# Altium PCB PCB.PcbDoc (part 1 of 2)
Units mm, origin at the board's own origin, x right, y up, seen from the top; angles counter-clockwise.
Board outline 200 x 150 mm, 2 copper layers (Top Layer, Bottom Layer); 72 components, 46 nets, 281 pads, 35 vias.
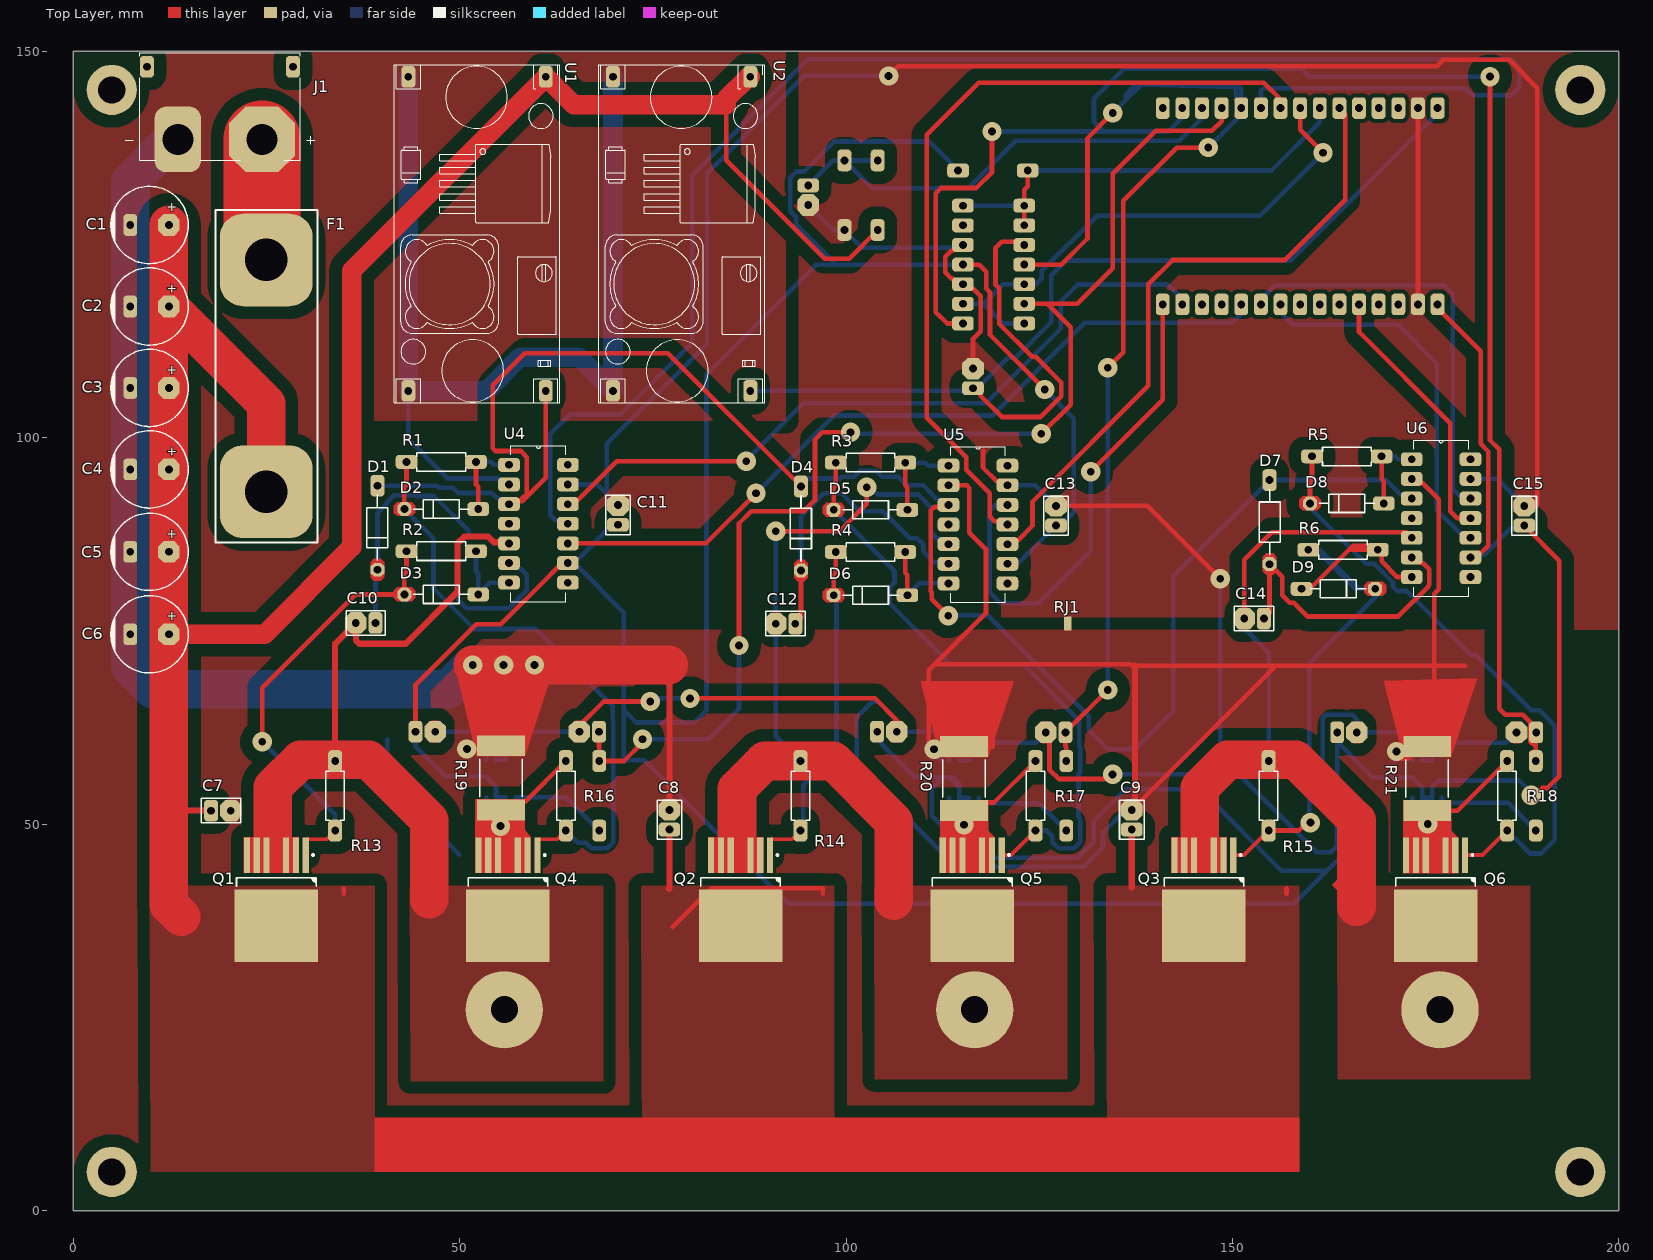
[diagram p0: Top Layer view]
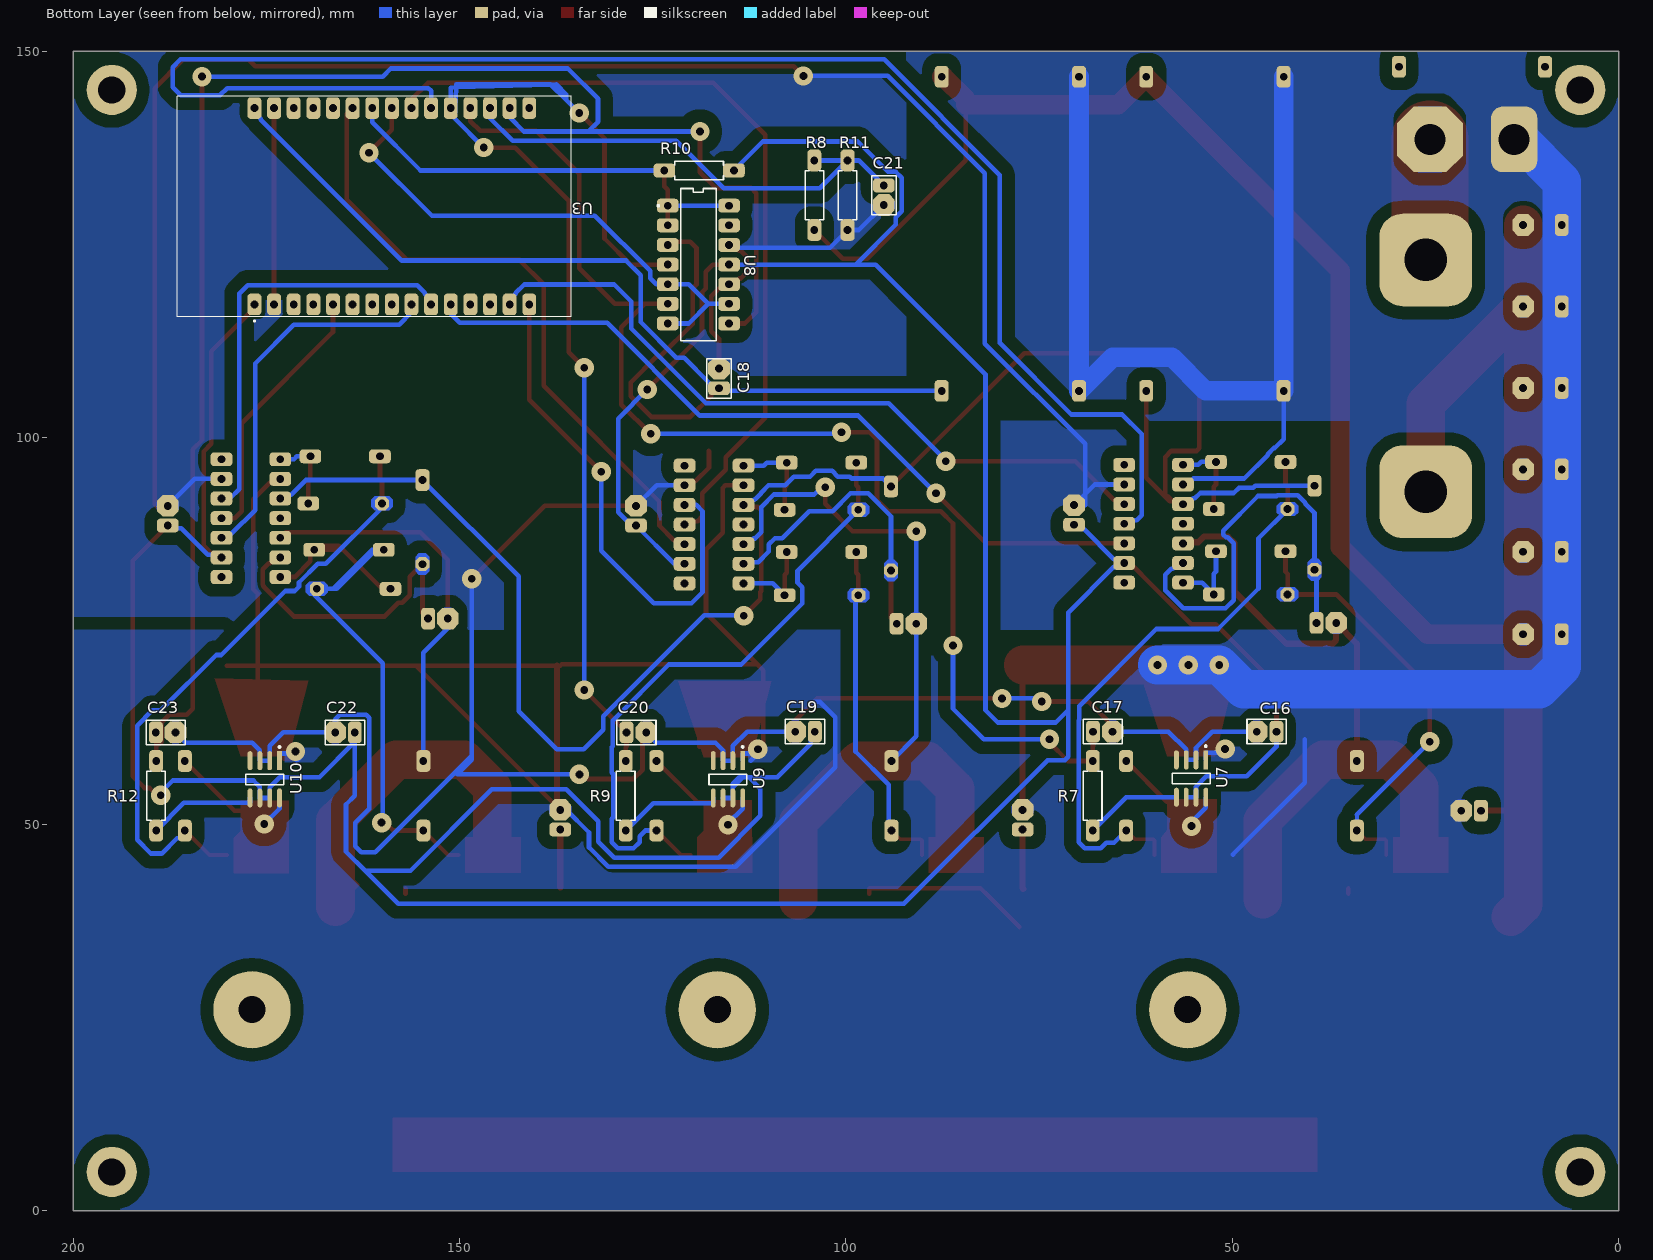
[diagram p1: Bottom Layer view, seen from below]

## Layer stack, top to bottom
Top Solder: solder mask 0.0102, Solder Resist, Dk 3.5
Top Layer: signal copper 0.0356
Dielectric 1: dielectric 0.32, FR-4, Dk 4.8
Bottom Layer: signal copper 0.0356
Bottom Solder: solder mask 0.0102, Solder Resist, Dk 3.5

## Board outline
0,0 0,150 200,150 200,0

## Design rules (kind name [scope] priority, off if disabled: settings)
Clearance Exception_NetTie [HasFootprint('SHORT10_8MIL-FP')] p1: gap=0.1 ignorepadtopadclearanceinfootprint=TRUE
Clearance Exception_D2PAK [HasFootprint('INFINEON TO-263-7')] p2: gap=0.1 ignorepadtopadclearanceinfootprint=FALSE
Clearance Exception_ESP32_Devikit [HasFootprint('MODULE_DEVKIT_V1_ESP32-WROOM-32')] p3: gap=0.54 ignorepadtopadclearanceinfootprint=FALSE
Clearance Fosso_Polygon [InPolygon] p4: gap=1.65 ignorepadtopadclearanceinfootprint=FALSE
Clearance [All] p5: gap=0.6 ignorepadtopadclearanceinfootprint=FALSE
HoleSize [All] p1: absolutevalues=TRUE maxlimit=6 minlimit=0.8 maxpercent=80.000 minpercent=20.000
MinimumSolderMaskSliver [All] p1 off: minsoldermaskwidth=0.254
PolygonConnect PolygonConnect_D2PAK [InPolygon] p1: connectstyle=Direct reliefconductorwidth=0.254 reliefentries=4 polygonreliefangle="90 Angle" airgapwidth=0.254
PolygonConnect [All] p2: connectstyle=Direct reliefconductorwidth=0.254 reliefentries=4 polygonreliefangle="90 Angle" airgapwidth=0.254
RoutingVias [All] p1: holewidth=1 width=2.5 viastyle="Through Hole" minholewidth=1 minwidth=2.5 maxholewidth=1 maxwidth=2.5
SMDNeckDown [All] p1: percent=20000.000
ShortCircuit ShortCircuit_StarGround [HasFootprint('SHORT10_8MIL-FP')] p1: allowed=TRUE
ShortCircuit [All] p2: allowed=FALSE
SilkToSilkClearance [All] p1 off: silktosilkclearance=0.254
SilkToSolderMaskClearance [IsPad] p1 off: minsilkscreentomaskgap=0.254 clearancetoexposedcopper=TRUE
SolderMaskExpansion [All] p1: expansion=0.102 istentingtop=FALSE
SupplyNets "Schematic Supply Nets_2" [InNet('PGND')] p1: voltage=0.000
SupplyNets "Schematic Supply Nets_1" [InNet('SGND')] p2: voltage=0.000
Width [All] p1: maxlimit=10 minlimit=0.203 preferedwidth=0.6
25 further rules are at their usual default settings.

## Classes and differential pairs
component class Supply: C1 C2 C3 C4 C5 C6 C7 C8 C9 F1 J1 RJ1 U1 U2
component class Sensors: C16 C17 C18 C19 C20 C21 C22 C23 R7 R8 R9 R10 R11 R12 U7 U8 U9 U10
component class Power: Q1 Q2 Q3 Q4 Q5 Q6 R13 R14 R15 R16 R17 R18 R19 R20 R21
component class Control: C10 C11 C12 C13 C14 C15 D1 D2 D3 D4 D5 D6 D7 D8 D9 R1 R2 R3 R4 R5 R6 U3 U4 U5 U6

## Components (designator, comment, footprint, x,y, rotation, side; value= is the part's Value field where it differs from the comment)
C1 "220µF" "CAP TH ALUM ELEC D10.00MM S5.00MM H20.00MM" 9.894,127.524 r0 top
C2 "220µF" "CAP TH ALUM ELEC D10.00MM S5.00MM H20.00MM" 9.894,116.983 r0 top
C3 "220µF" "CAP TH ALUM ELEC D10.00MM S5.00MM H20.00MM" 9.894,106.442 r0 top
C4 "220µF" "CAP TH ALUM ELEC D10.00MM S5.00MM H20.00MM" 9.894,95.901 r0 top
C5 "220µF" "CAP TH ALUM ELEC D10.00MM S5.00MM H20.00MM" 9.894,85.233 r0 top
C6 "220µF" "CAP TH ALUM ELEC D10.00MM S5.00MM H20.00MM" 9.894,74.565 r0 top
C7 "1 uF" CAPR51-254-508X318X736 19.125,51.75 r180 top
C8 "1 uF" CAPR51-254-508X318X736 77.15,50.575 r270 top
C9 "1 uF" CAPR51-254-508X318X736 136.975,50.575 r270 top
C10 "4.7 uF 50 V" CAPR51-254-508X318X736 37.854,76.041 r0 top
C11 "0.1 uF 50 V" CAPR51-254-508X318X736 70.493,90.011 r270 top
C12 "4.7 uF 50 V" CAPR51-254-508X318X736 92.175,75.941 r0 top
C13 "0.1 uF 50 V" CAPR51-254-508X318X736 127.175,89.911 r270 top
C14 "4.7 uF 50 V" CAPR51-254-508X318X736 152.8,76.6 r0 top
C15 "0.1 uF 50 V" CAPR51-254-508X318X736 187.75,89.911 r270 top
C16 "0.1 uF 50 V" CAPR51-254-508X318X736 45.575,61.975 r180 bottom
C17 "0.1 uF 50 V" CAPR51-254-508X318X736 66.775,61.975 r0 bottom
C18 "0.1 uF 50 V" CAPR51-254-508X318X736 116.425,107.675 r270 bottom
C19 "0.1 uF 50 V" CAPR51-254-508X318X736 105.3,61.975 r180 bottom
C20 "0.1 uF 50 V" CAPR51-254-508X318X736 127.125,61.875 r0 bottom
C21 "0.1 uF 50 V" CAPR51-254-508X318X736 95.1,131.375 r90 bottom
C22 "0.1 uF 50 V" CAPR51-254-508X318X736 164.825,61.875 r180 bottom
C23 "0.1 uF 50 V" CAPR51-254-508X318X736 188.025,61.875 r0 bottom
D1 "UF4004" FP-017AH-MFG 39.378,88.36 r90 top
D2 "1N5819" ONSC-AXIAL_LEAD-2-59-10_P 47.633,90.773 r0 top
D3 "1N5819" ONSC-AXIAL_LEAD-2-59-10_P 47.633,79.724 r0 top
D4 "UF4004" FP-017AH-MFG 94.175,88.26 r90 top
D5 "1N5819" ONSC-AXIAL_LEAD-2-59-10_P 103.175,90.673 r0 top
D6 "1N5819" ONSC-AXIAL_LEAD-2-59-10_P 103.175,79.624 r0 top
D7 "UF4004" FP-017AH-MFG 154.8,89.085 r90 top
D8 "1N5819" ONSC-AXIAL_LEAD-2-59-10_P 164.8,91.498 r0 top
D9 "1N5819" ONSC-AXIAL_LEAD-2-59-10_P 163.7,80.45 r180 top
F1 "0498080.M" 0498080M -121.431,109.157 r270 top
J1 "XT90PW-M" AMASS_XT90PW-M 19,148 r180 top
Q1 "IRFS7530-7PPBF" "INFINEON TO-263-7" 26.289,40.226 r270 top
Q2 "IRFS7530-7PPBF" "INFINEON TO-263-7" 86.36,40.226 r270 top
Q3 "IRFS7530-7PPBF" "INFINEON TO-263-7" 146.304,40.226 r270 top
Q4 "IRFS7530-7PPBF" "INFINEON TO-263-7" 56.261,40.226 r270 top
Q5 "IRFS7530-7PPBF" "INFINEON TO-263-7" 116.332,40.226 r270 top
Q6 "IRFS7530-7PPBF" "INFINEON TO-263-7" 176.276,40.226 r270 top
R1 "MFR-25FBF52-10R" RESA60-630X240 47.633,96.869 r180 top value=10
R2 "MFR-25FBF52-10R" RESA60-630X240 47.633,85.312 r180 top value=10
R3 "MFR-25FBF52-10R" RESA60-630X240 103.175,96.769 r180 top value=10
R4 "MFR-25FBF52-10R" RESA60-630X240 103.175,85.212 r180 top value=10
R5 "MFR-25FBF52-10R" RESA60-630X240 164.8,97.594 r180 top value=10
R6 "MFR-25FBF52-10R" RESA60-630X240 164.3,85.5 r180 top value=10
R7 "MFR-25FBF52-10R" RESA60-630X240 68.075,53.675 r90 bottom value=10
R8 "MFR-25FBF52-39K" RESA60-630X240 104.1,131.375 r90 bottom value=39k
R9 "MFR-25FBF52-10R" RESA60-630X240 128.5,53.675 r90 bottom value=10
R10 "MFR-25FBF52-10K" RESA60-630X240 119,134.575 r180 bottom value=10k
R11 "MFR-25FBF52-4K7" RESA60-630X240 99.795,131.375 r270 bottom value=4.7k
R12 "MFR-25FBF52-10R" RESA60-630X240 189.25,53.675 r90 bottom value=10
R13 "MFR-25FBF52-10K" RESA60-630X240 33.9,53.675 r90 top value=10k
R14 "MFR-25FBF52-10K" RESA60-630X240 94.107,53.675 r90 top value=10k
R15 "MFR-25FBF52-10K" RESA60-630X240 154.686,53.675 r90 top value=10k
R16 "MFR-25FBF52-10K" RESA60-630X240 63.754,53.675 r90 top value=10k
R17 "MFR-25FBF52-10K" RESA60-630X240 124.525,53.675 r90 top value=10k
R18 "MFR-25FBF52-10K" RESA60-630X240 185.547,53.675 r90 top value=10k
R19 "CSS2H-3920R-1L00F" FP-CSS2H-3920R-1L00F-MFG 55.35,56 r90 top
R20 "CSS2H-3920R-1L00F" FP-CSS2H-3920R-1L00F-MFG 115.275,55.9 r90 top
R21 "CSS2H-3920R-1L00F" FP-CSS2H-3920R-1L00F-MFG 175.2,55.9 r90 top
RJ1 "Net Tie 0.6x1.4mm" SHORT10_8MIL-FP 128.679,76.339 r90 top net-tie
U1 "Buck Converver 15V" YAAJ_DCDC_STEPDOWN_LM2596 61.155,146.7 r270 top value=YAAJ_DCDC_StepDown_LM2596
U2 "Buck Converver 5V" YAAJ_DCDC_STEPDOWN_LM2596 87.625,146.7 r270 top value=YAAJ_DCDC_StepDown_LM2596
U3 "DEVKIT_V1_ESP32-WROOM-32" MODULE_DEVKIT_V1_ESP32-WROOM-32 161.025,129.95 r90 bottom
U4 "IR2110PBF" DIP254P762X533-14 64.016,81.248 r0 top
U5 "IR2110PBF" DIP254P762X533-14 120.887,81.148 r0 top
U6 "IR2110PBF" DIP254P762X533-14 180.804,81.973 r0 top
U7 "INA240A1DR" FP-D0008A-IPC_A 55.35,55.9 r270 bottom
U8 "LM339N" FP-N0014A-MFG 119.097,122.4 r180 bottom
U9 "INA240A1DR" FP-D0008A-IPC_A 115.275,55.8 r270 bottom
U10 "INA240A1DR" FP-D0008A-IPC_A 175.2,55.8 r270 bottom

## Footprints (in the part's own frame and the unit in brackets; to place one, negate y for a bottom-side part, rotate by r counter-clockwise, add the part's x,y. Pads: shape width x height; smd on the part's side, far side on the other; paste and mask are expansions set on the pad)
0498080M [mm] "80 A 32 V Fuse Automotive Bolt Mount Auto Link"
  rrect50% 12x12 hole 5.5: 1(-13.843,146.431) 2(16.157,146.431)
  silkscreen extent -20.32,139.83 22.73,153.04
AMASS_XT90PW-M [mm]
  rrect50% 6x8.5 hole 4: N(5.45,9.4)
  oct 8.5x8.5 hole 4: P(-5.45,9.4)
  rrect50% 1.8x2.8 hole 1: S1(-9.45,0) S2(9.45,0)
  silkscreen extent -12.25,-1.78 12.25,12.1, body extent -10.6,-1.78 10.6,12.1, height 0.25
"CAP TH ALUM ELEC D10.00MM S5.00MM H20.00MM" [mm]
  oct 2.8x2.8 hole 1: 1(2.5,0)
  rrect50% 1.8x2.8 hole 1: 2(-2.5,0)
  silkscreen extent -5,-5 5,5, body extent -5.01,-5 5,5, height 20
CAPR51-254-508X318X736 [mm]
  oct 2.8x2.8 hole 1: 1(-1.27,0)
  rrect50% 1.8x2.8 hole 1: 2(1.27,0)
  silkscreen extent -2.54,-1.59 2.54,1.59, body extent -2.54,-1.59 2.54,1.59, height 7.36
DIP254P762X533-14 [mm]
  rrect50% 2.8x1.8 hole 1: 1(-7.62,15.24) 2(-7.62,12.7) 3(-7.62,10.16) 4(-7.62,7.62) 5(-7.62,5.08) 6(-7.62,2.54) 7(-7.62,0) 8(0,0) 9(0,2.54) 10(0,5.08) 11(0,7.62) 12(0,10.16) 13(0,12.7) 14(0,15.24)
  silkscreen extent -7.37,-2.46 -0.25,17.7, body extent -7.89,-1.78 0.02,17.53, height 5.33
FP-017AH-MFG [mm]
  oct 1.8x1.8 hole 1 paste-2539.97 mask+0: 1(-5.438,0)
  rrect50% 2.8x1.8 hole 1 paste-2539.97 mask+0: 2(5.438,0)
  silkscreen extent -4.24,-1.36 4.24,1.36, body extent -6.34,-1.46 6.34,1.46, height 0.25
FP-CSS2H-3920R-1L00F-MFG [mm]
  rect 2.7x6.2 smd paste+0 mask+0: 1(-4.15,0) 2(4.15,0)
  silkscreen extent -2.42,-2.75 2.42,2.75, body extent -5.6,-3.2 5.6,3.2, height 0.25
FP-D0008A-IPC_A [mm]
  rect 2.469x0.622 smd paste+0 mask+0: 1(-2.414,1.905)
  rrect100% 2.469x0.622 smd paste+0 mask+0: 2(-2.414,0.635) 3(-2.414,-0.635) 4(-2.414,-1.905) 5(2.414,-1.905) 6(2.414,-0.635) 7(2.414,0.635) 8(2.414,1.905)
  silkscreen extent -4.32,-2.45 0.68,2.45, body extent -3,-2.45 3,2.45, height 1.75
FP-N0014A-MFG [mm]
  rrect50% 2.8x1.8 hole 1 paste-2539.97 mask+0: 1(-3.97,7.62) 2(-3.97,5.08) 3(-3.97,2.54) 4(-3.97,0) 5(-3.97,-2.54) 6(-3.97,-5.08) 7(-3.97,-7.62) 8(3.97,-7.62) 9(3.97,-5.08) 10(3.97,-2.54) 11(3.97,0) 12(3.97,2.54) 13(3.97,5.08) 14(3.97,7.62)
  silkscreen extent -5.33,-9.84 2.3,9.84, body extent -4.29,-9.78 4.31,9.76, height 5.08
"INFINEON TO-263-7" [mm]
  rect 4.6x0.8 smd: 1(-5.775,3.81) 2(-5.775,2.54) 3(-5.775,1.27) 5(-5.775,-1.27) 6(-5.775,-2.54) 7(-5.775,-3.81)
  rect 9.4x10.8 smd: 8(3.375,0)
  silkscreen extent -5.9,-5.15 -1.72,5.15, body extent -7.62,-5.08 7.63,5.08, height 4.54
MODULE_DEVKIT_V1_ESP32-WROOM-32 [mm]
  rrect50% 2.8x1.8 hole 1 mask+0.102: 1(-12.7,15.515) 2(-12.7,12.975) 3(-12.7,10.435) 4(-12.7,7.895) 5(-12.7,5.355) 6(-12.7,2.815) 7(-12.7,0.275) 8(-12.7,-2.265) 9(-12.7,-4.805) 10(-12.7,-7.345) 11(-12.7,-9.885) 12(-12.7,-12.425) 13(-12.7,-14.965) 14(-12.7,-17.505) 15(-12.7,-20.045) 16(12.7,-20.045) 17(12.7,-17.505) 18(12.7,-14.965) 19(12.7,-12.425) 20(12.7,-9.885) 21(12.7,-7.345) 22(12.7,-4.805) 23(12.7,-2.265) 24(12.7,0.275) 25(12.7,2.815) 26(12.7,5.355) 27(12.7,7.895) 28(12.7,10.435) 29(12.7,12.975) 30(12.7,15.515)
  silkscreen extent -14.95,-25.48 14.23,25.48, body extent -13.97,-24.8 13.97,30.3, height 6.69
ONSC-AXIAL_LEAD-2-59-10_P [mm]
  oct 1.8x1.8 hole 1: 1(-4.77,0)
  rrect50% 2.8x1.8 hole 1: 2(4.77,0)
  silkscreen extent -3.6,-1.18 3.59,1.17, body extent -5.16,-1.17 5.16,1.17, height 2.34
RESA60-630X240 [mm]
  rrect50% 2.8x1.8 hole 1: 1(-4.5,0) 2(4.5,0)
  silkscreen extent -3.15,-1.2 3.15,1.2, body extent -4.77,-1.19 4.77,1.2, height 2.4
SHORT10_8MIL-FP [mm]
  rect 1x1 smd paste-1: 1(-0.762,0) 2(0.025,0)
YAAJ_DCDC_STEPDOWN_LM2596 [mm]
  rrect50% 2.8x1.8 hole 1: 1(0,0) 2(0,-17.78) 3(40.64,-17.78) 4(40.64,0)
  silkscreen extent -1.56,-19.61 42.22,1.84

## Part data
C1 C3 C4 C5 C6: library part UPW1J221MPD, "CAP ALUM 220UF 20% 63V RADIAL", Device Package="Radial, Can", Lifetime @ Temp.="5000 Hrs @ 105°C", manufacturer=Nichicon, Operating Temperature="-55°C ~ 105°C", Ripple Current @ High Frequency="885mA @ 100kHz", Ripple Current @ Low Frequency="575.25mA @ 120Hz", Supplier Part Number 1=493-1942-ND, Tolerance=±20%, Voltage - Rated=63V, Applications="General Purpose", Capacitance=220µF, componentlink1description=Datasheet, componentlink1url=http://nichicon-us.com/english/products/pdfs/e-upw.pdf, componentlink2description="DigiKey Link", componentlink2url=http://digikey.com/product-detail/en/nichicon/UPW1J221MPD/493-1942-ND/589683, Height - Seated (Max)="0.787\" (20.00mm)", Impedance="147 mOhms", lastupdated="02/09/2020 01:31:30", Lead Spacing="0.197\" (5.00mm)", Lifecycle Status=Active, Minimum Order=1, Mounting Type="Through Hole", Package / Case="Radial, Can", packaging=Bulk, Part Number=UPW1J221MPD, Part Status=Active, partid=12422, Polarization=Polar, price=0.65, series=UPW, Size / Dimension="0.394\" Dia (10.00mm)", Supplier 1=DigiKey
C2: library part UPW1J221MPD, "UPW1J221MPD / CAP ALUM 220UF 20% 63V RADIAL", Device Package="Radial, Can", Lifetime @ Temp.="5000 Hrs @ 105°C", manufacturer=Nichicon, Operating Temperature="-55°C ~ 105°C", Ripple Current @ High Frequency="885mA @ 100kHz", Ripple Current @ Low Frequency="575.25mA @ 120Hz", Supplier Part Number 1=493-1942-ND, Tolerance=±20%, Voltage - Rated=63V, Applications="General Purpose", Capacitance=220µF, componentlink1description=Datasheet, componentlink1url=http://nichicon-us.com/english/products/pdfs/e-upw.pdf, componentlink2description="DigiKey Link", componentlink2url=http://digikey.com/product-detail/en/nichicon/UPW1J221MPD/493-1942-ND/589683, Height - Seated (Max)="0.787\" (20.00mm)", Impedance="147 mOhms", lastupdated="02/09/2020 01:31:30", Lead Spacing="0.197\" (5.00mm)", Lifecycle Status=Active, Minimum Order=1, Mounting Type="Through Hole", Package / Case="Radial, Can", packaging=Bulk, Part Number=UPW1J221MPD, Part Status=Active, partid=12422, Polarization=Polar, price=0.65, series=UPW, Size / Dimension="0.394\" Dia (10.00mm)", Supplier 1=DigiKey
C7 C8 C9 C10 C11 C12 C13 C14 C15 C16 C17 C18 C19 C20 C21 C22 C23: library part CMP-1664-00004-1, "Radial Leaded Multilayer Ceramic Capacitor, 0.1 uF, +/- 10%, 50 V, -55 to 125 degC, 2-Pin THD, RoHS, Tape and Reel", Case\Package=SOT-23-5, Dropout Voltage="260 mV", Max Input Voltage="8 V", Max Operating Temperature="85 degC", Max Power Dissipation="250 mW", Min Operating Temperature="-40 degC", Output Current="150 mA", Output Voltage="5 V", Package Quantity=3000, componentlink1description="Manufacturer URL", componentlink1url=http://www.kemet.com/, componentlink2description=Datasheet, componentlink2url=http://www.kemet.com/docfinder?Partnumber=C320C104K5R5TA, DatasheetVersion=Dec-15, Height="1.3 mm", Length="3 mm", Mount="Surface Mount", Outputs=1, PackageDescription="2-Pin Through Hole Device, Body 5.08 x 3.18 mm, Pitch 2.54 mm", PackageReference=CAPR51-254-508X318X736, packaging="Tape and Reel", Pins=5, Radiation Hardening=No, RoHSCompliant=true, Width="1.8 mm"
D1 D4 D7: library part CMP-00278-84331690-1, "UF4004 Rectifier Diode, 1 Phase, 1 Element, 1A, 400V V(RRM), Silicon, DO-41", Average Rectified Current=1A, Capacitance=17pF, Forward Voltage=1V, Manufacturer Lifecycle Status="ACTIVE, NOT REC", Max Forward Surge Current (Ifsm)=30A, Max Junction Temperature (Tj)=150°C, Max Repetitive Reverse Voltage (Vrrm)=400V, Min Operating Temperature=-65°C, Peak Reverse Current=10µA, Power Dissipation=2.08W, Contact Plating=Tin, Current Rating=1A, Diameter=2.72mm, Element Configuration=Single, Forward Current=1A, Height=2.72mm, Lead Free="Lead Free", Length=5.2mm, Lifecycle Status=NRND, Max Operating Temperature=150°C, Max Reverse Voltage (DC)=400V, Max Surge Current=30A, Mount="Through Hole", NexarPartId=84331690, Number of Pins=2, Output Current=1A, packaging="Cut Tape", Peak Non-Repetitive Surge Current=30A, Polarity=Standard, Radiation Hardening=No, REACH SVHC="No SVHC", Recovery Time=50ns, Reverse Recovery Time=50ns, Reverse Voltage=400V, RoHS=Compliant, Schedule B="8541100080, 8541100080", Voltage Rating (DC)=400V, Weight=245mg, Width=6.35mm
D2 D3 D5 D6 D8 D9: library part CMP-004-00009-2, "Low Drop Power Schottky Rectifier, 40 V, 1 A, 2-Pin DO-41, RoHS", Case/Package=DO, Forward Current=1A, manufacturer="ON Semiconductor", Max Operating Temperature=125°C, Max Surge Current=25A, Min Operating Temperature=-65°C, Package Description="2-Pin, Axial Lead, Diameter 2.35 mm", Package Reference=AXIAL_LEAD-2-59-10, Package Version="Rev. U, 02/2005", Peak Reverse Current=1mA, Datasheet URL=http://www.onsemi.cn/pub_link/Collateral/1N5817-D.PDF, Datasheet Version="Rev. 10, 07/2006", Manufacturer URL=http://www.onsemi.com/, Mounting Technology=TH, Package URL=http://www.onsemi.cn/pub_link/Collateral/59-10.PDF, packaging=Bulk, Pins=2, RoHS Compliant=True
F1: library part Fuse, "80 A 32 V Fuse Automotive Bolt Mount Auto Link", CURRENT=80, Resistance=1m, SimulationGenericComponent=True
J1: "Socket; DC supply; XT90; male; PIN: 2; on PCBs; THT; Colour: yellow", Package=Package, Check_prices=https://www.snapeda.com/parts/XT90PW-M/AMASS/view-part/?ref=eda, MF=AMASS, MP=XT90PW-M, SnapEDA_Link=https://www.snapeda.com/parts/XT90PW-M/AMASS/view-part/?ref=snap
Q1 Q2 Q3 Q4 Q5 Q6: library part IRFS7530TRL7PP, "MOSFET N CH 60V 240A D2PAK", Current - Continuous Drain (Id) @ 25°C="240A (Tc)", Drain to Source Voltage (Vdss)="60 V", Drive Voltage (Max Rds On,  Min Rds On)="6V, 10V", Input Capacitance (Ciss) (Max) @ Vds="12960 pF @ 25 V", manufacturer="Infineon Technologies", Operating Temperature="-55°C ~ 175°C (TJ)", Package / Case="TO-263-7, D²Pak (6 Leads + Tab)", Power Dissipation (Max)="375W (Tc)", Supplier Device Package=PG-TO263-7, Supplier Part Number 1=IRFS7530TRL7PPCT-ND, componentlink1description=Datasheet, componentlink1url=https://www.infineon.com/dgdl/irfs7530-7ppbf.pdf?fileId=5546d462533600a40153563a9d1e21d8, componentlink2description="DigiKey Link", componentlink2url=https://www.digikey.com/en/products/detail/infineon-technologies/IRFS7530TRL7PP/4772498, FET Type=N-Channel, Gate Charge (Qg) (Max) @ Vgs="354 nC @ 10 V", lastupdated="01/04/2026 21:01:32", Lifecycle Status=Active, Minimum Order=1, Mounting Type="Surface Mount", packaging=TapeAndReel, Part Number=IRFS7530TRL7PP, Part Status=Active, price=1.59, Rds On (Max) @ Id, Vgs="1.4mOhm @ 100A, 10V", series="HEXFET®, StrongIRFET™", Supplier 1=DigiKey, Technology="MOSFET (Metal Oxide)", Vgs (Max)=±20V, Vgs(th) (Max) @ Id="3.7V @ 250µA"
R1 R2 R3 R4 R5 R6 R7 R9 R12: library part CMP-009-00048-4, "10 Ohms ±1% 0.25W, 1/4W Through Hole Resistor Axial Metal Film", Case/Package=Axial, manufacturer=Yageo, Max Operating Temperature=155°C, Min Operating Temperature=-55°C, Package Description="2-Pin Axial Lead, Dia 2.4 mm, Body Length 6.3 mm", Package Quantity=200, Package Reference=MFR-25, Power=250mW, Tolerance=1%, Voltage Rating=250V, Composition=CarbonFilm, Datasheet URL=http://www.yageo.com/documents/recent/Yageo%20LR_MFR_2013.pdf, Datasheet Version=Apr-13, Manufacturer URL=http://www.yageo.com/, Mounting Technology=TH, packaging=Bulk, RoHS Compliant=True
R8: library part CMP-009-00048-4, "39 kOhms ±1% 0.25W, 1/4W Through Hole Resistor Axial Metal Film", Case/Package=Axial, manufacturer=Yageo, Max Operating Temperature=155°C, Min Operating Temperature=-55°C, Package Description="2-Pin Axial Lead, Dia 2.4 mm, Body Length 6.3 mm", Package Quantity=200, Package Reference=MFR-25, Power=250mW, Tolerance=1%, Voltage Rating=250V, Composition=CarbonFilm, Datasheet URL=http://www.yageo.com/documents/recent/Yageo%20LR_MFR_2013.pdf, Datasheet Version=Apr-13, Manufacturer URL=http://www.yageo.com/, Mounting Technology=TH, packaging=Bulk, RoHS Compliant=True
R10 R13 R14 R15 R16 R17 R18: library part CMP-009-00048-4, "10 kOhms ±1% 0.25W, 1/4W Through Hole Resistor Axial Metal Film", Case/Package=Axial, manufacturer=Yageo, Max Operating Temperature=155°C, Min Operating Temperature=-55°C, Package Description="2-Pin Axial Lead, Dia 2.4 mm, Body Length 6.3 mm", Package Quantity=200, Package Reference=MFR-25, Power=250mW, Tolerance=1%, Voltage Rating=250V, Composition=CarbonFilm, Datasheet URL=http://www.yageo.com/documents/recent/Yageo%20LR_MFR_2013.pdf, Datasheet Version=Apr-13, Manufacturer URL=http://www.yageo.com/, Mounting Technology=TH, packaging=Bulk, RoHS Compliant=True
R11: library part CMP-009-00048-4, "4.7 kOhms ±1% 0.25W, 1/4W Through Hole Resistor Axial Metal Film", Case/Package=Axial, manufacturer=Yageo, Max Operating Temperature=155°C, Min Operating Temperature=-55°C, Package Description="2-Pin Axial Lead, Dia 2.4 mm, Body Length 6.3 mm", Package Quantity=200, Package Reference=MFR-25, Power=250mW, Tolerance=1%, Voltage Rating=250V, Composition=CarbonFilm, Datasheet URL=http://www.yageo.com/documents/recent/Yageo%20LR_MFR_2013.pdf, Datasheet Version=Apr-13, Manufacturer URL=http://www.yageo.com/, Mounting Technology=TH, packaging=Bulk, RoHS Compliant=True
R19 R20 R21: library part CMP-07231-006016-1, "RES 0.001 OHM 1% 8W 3920", Case Code (Imperial)=3920, Case Code (Metric)=1052, Max Operating Temperature=170°C, Max Power Dissipation=8W, Min Operating Temperature=-55°C, Resistance=1mR, Resistor Type="Metal Element", Temperature Coefficient=50ppm/°C, Tolerance=1%, Case/Package=3920, Features="Moisture Resistant", Height=0.02inch, Length=0.394inch, Number of Terminations=2, packaging="Cut Tape", Power Rating=8W, REACH SVHC="No SVHC", RoHS Compliant=Yes, Width=0.205inch
RJ1: library part CMP-009-00120-2, Max Operating Temperature=155°C, Min Operating Temperature=-55°C, Pins=2
U1 U2: library part YAAJ_DCDC_StepDown_LM2596
U3: "WROOM-32 Development Board ESP32 ESP-32S WiFi Bluetooth Dev Module", Package=Package, Check_prices=https://www.snapeda.com/parts/DEVKIT%20V1%20ESP32-WROOM-32/Do+it/view-part/?ref=eda, MF="Do it", MP="DEVKIT V1 ESP32-WROOM-32", SnapEDA_Link=https://www.snapeda.com/parts/DEVKIT%20V1%20ESP32-WROOM-32/Do+it/view-part/?ref=snap
U4 U5 U6: "High and Low Side Driver, All High Voltage Pins On One Side, Separate Logic and Power Ground, Shut-Down", Package="DIP-14 Infineon", Availability="In Stock", Check_prices=https://www.snapeda.com/parts/IR2110PBF/Infineon+Technologies/view-part/?ref=eda, MF=Infineon, MP=IR2110PBF, price=None, Purchase-URL=https://pricing.snapeda.com/search/part/IR2110PBF/?ref=eda, SnapEDA_Link=https://www.snapeda.com/parts/IR2110PBF/Infineon+Technologies/view-part/?ref=snap
U7 U9 U10: library part CMP-04895-000179-1, "IC CURR SENSE 1 CIRCUIT 8SOIC", Case/Package=SOIC, Input Bias Current=90uA, Input Offset Voltage (Vos)=5uV, Max Operating Temperature=125°C, Min Operating Temperature=-40°C, Operating Supply Current=1.8mA, -3db Bandwidth=400kHz, Mount="Surface Mount", Number of Circuits=1, Number of Pins=8, packaging="Cut Tape", RoHS Compliant=Yes, Slew Rate=2V/µs
U8: library part CMP-0055-00143-4, "IC QUAD DIFF COMPARATOR 14-DIP", Case/Package=PDIP, Dual Supply Voltage=9V, Input Bias Current=250nA, Input Offset Voltage (Vos)=5mV, Max Dual Supply Voltage=15V, Max Operating Temperature=70°C, Max Power Dissipation=1.05W, Max Supply Current=500uA, Max Supply Voltage=30V, Min Dual Supply Voltage=1V, Min Operating Temperature=0°C, Min Supply Voltage=2V, Nominal Supply Current=2mA, Output Current=20mA, Output Current per Channel=6mA, Package Quantity=25, Power Dissipation=1.05kW, Quiescent Current=2.5mA, Voltage Gain=106.02dB, Contact Plating=Gold, Height=4.57mm, Lead Free="Lead Free", Length=19.3mm, Max Input Current=250nA, Mount="Through Hole", Number of Channels=4, Number of Elements=4, Number of Pins=14, Output Type=TTL, packaging=Rail/Tube, Radiation Hardening=No, REACH SVHC="No SVHC", Response Time=1.3us, Weight=0.032734oz, Width=6.35mm

## Free pads (board coordinates)
  round 10 hole 3.5: CA(55.8,26) CB(116.65,26) CC(176.85,26)
  round 6.5 hole 3.5 unplated: H1(5,5) H2(195,5) H3(195,145) H4(5,145)

## Via types
v1: diameter 2.5, hole 1, Top Layer to Bottom Layer, 35 vias

## Nets (pads, with @x,y where several pads share a name; then routed paths per layer and width w, separated by ;. In a path a pad name is that pad's centre, name@x,y a point inside that pad or via, vN(x,y) a via of type N, cw(c..) or ccw(c..) an arc to the next point about the centre after c; other vN are vias at no path point)
AH: U3.11 U4.10 | length 100.6
  Top Layer w0.6: U4.10@64.016,86.328 81.883,86.328 v1(88.367,92.812)
  Bottom Layer w0.6: v1(88.367,92.812) 98.425,102.87 118.897,102.87 130.902,114.875 149.978,114.875 151.14,116.037 U3.11@151.14,117.25
AL: U3.14 U4.12 | length 94.9
  Top Layer w0.6: U4.12@64.016,91.408 64.523,91.915 65.315,91.915 70.35,96.95 v1(87.1,96.95)
  Bottom Layer w0.6: v1(87.1,96.95) 87.1,97.082 94.488,104.47 118.11,104.47 127.768,114.128 127.768,117.629 129.964,119.825 141.629,119.825 142.72,118.734 142.72,118.631 143.52,117.831 U3.14@143.52,117.25
BH: U3.25 U5.10 | length 83.8
  Top Layer w0.6: U5.10@120.887,86.228 121.394,86.735 122.26,86.735 124.13,88.605 124.13,91.73 139.116,106.716 139.116,119.863 142.24,122.987 156.76,122.987 164.583,130.81 164.583,141.907 U3.25@163.84,142.65
BL: U3.15 U5.12 | length 65.4
  Top Layer w0.6: v1(131.674,95.606) 140.98,104.912 U3.15@140.98,117.25
  Bottom Layer w0.6: U5.12@120.887,91.308 119.38,91.308 118.567,90.495 118.567,80.01 119.99,78.588 124.866,78.588 131.674,85.395 v1(131.674,95.606)
CH: U3.9 U6.10 | length 48.8
  Bottom Layer w0.6: U3.9@156.22,117.25 156.22,116.205 157.825,114.6 171.455,114.6 176.454,109.601 176.454,90.621 179.515,87.56 180.297,87.56 U6.10@180.804,87.053
CL: U3.10 U6.12 | length 54.8
  Bottom Layer w0.6: U3.10@153.68,117.25 153.68,117.831 154.48,118.631 154.48,118.734 155.496,119.75 177.405,119.75 178.5,118.655 178.5,93.338 179.705,92.133 U6.12@180.804,92.133
"Isense A +": Q4.2 Q4.3 Q4.5 Q4.6 Q4.7 R16.2 R19.1 U7.8 | length 15.6
  Top Layer w0.6: R19.1@55.35,51.85 56.4,52.9 58.479,52.9 R16.2@63.754,58.175
  Bottom Layer w0.6: U7.8@53.445,53.486 53.449,53.482 53.449,52.116 54.465,51.1 54.525,51.1 55.3,50.325 v1(55.3,49.75)
"Isense A Out": C17.2 R7.2 U3.19 U8.6 | length 161.3
  Top Layer w0.6: C17.2@68.045,61.975 68.045,60.076 68.075,60.046 R7.2@68.075,58.175 71.275,58.175 73.675,60.575 v1(73.675,60.975) ; v1(86.157,73.127) 86.157,88.905 87.727,90.475 94.513,90.475 95.987,91.948 95.987,99.757 96.941,100.711 v1(100.584,100.711) ; U8.6@123.068,117.32 126.037,117.32 ; v1(125.273,100.508) 129.057,104.292 129.057,114.3 126.037,117.32 ; U3.19@148.6,142.65 148.6,140.97 147.33,139.7 140.09,139.7 134.518,134.129 134.518,121.92 129.918,117.32 126.037,117.32
  Bottom Layer w0.6: v1(73.675,60.975) 82.184,60.975 86.157,64.948 v1(86.157,73.127) ; v1(100.584,100.711) 100.787,100.508 v1(125.273,100.508)
"Isense B +": Q5.2 Q5.3 Q5.5 Q5.6 Q5.7 R17.2 R20.1 U9.8 | length 16.2
  Top Layer w0.6: R20.1@115.275,51.75 116.325,52.8 119.15,52.8 R17.2@124.525,58.175
  Bottom Layer w0.6: U9.8@113.37,53.386 113.374,53.382 113.374,52.016 115.275,50.115 v1(115.275,49.925)
"Isense B Out": C20.2 R9.2 U3.20 U8.4 | length 166.7
  Top Layer w0.6: U8.4@123.068,122.4 127.864,122.4 131.242,125.778 131.242,138.742 v1(134.525,142.025) ; R9.2@128.5,58.175 128.5,59.969 128.395,60.074 C20.2@128.395,61.875 v1(133.883,67.363) ; v1(133.883,109.044) 135.89,111.051 135.89,130.653 142.778,137.541 v1(146.863,137.541)
  Bottom Layer w0.6: v1(133.883,67.363) v1(133.883,109.044) ; v1(134.525,142.025) 136.198,143.698 ; v1(146.863,137.541) U3.20@150.622,141.3 ; U3.20@151.14,142.65 151.14,145.303 150.437,145.324 ; 136.198,143.698 138.192,145.692 ; 136.198,143.698 136.198,144.403 137.508,145.713 138.192,145.692 ; 138.192,145.692 150.437,145.324 ; 138.192,145.692 138.22,145.72 150.419,145.72 150.437,145.324 ; 150.437,145.324 U3.20@150.561,142.623 ; 150.437,145.324 U3.20@150.561,142.623 ; U3.20@150.561,142.623 U3.20@150.622,141.3 ; U3.20@150.561,142.623 U3.20@150.622,141.3
"Isense C +": Q6.2 Q6.3 Q6.5 Q6.6 Q6.7 R18.2 R21.1 U10.8 | length 17.2
  Top Layer w0.6: R21.1@175.2,51.75 179.122,51.75 R18.2@185.547,58.175
  Bottom Layer w0.6: U10.8@173.295,53.386 173.299,53.382 173.299,52.016 175.275,50.04 v1(175.275,50.025)
"Isense C Out": C23.2 R12.2 U3.17 U8.8 | length 211.9
  Top Layer w0.6: U8.8@115.127,114.78 113.081,114.78 111.627,116.233 111.627,131.643 112.293,132.309 116.84,132.309 118.897,134.366 v1(118.897,139.623) ; v1(183.325,146.725) 183.325,99.698 184.537,98.486 184.537,64.952 185.314,64.175 187.578,64.175 188.555,63.198 188.555,60.676 188.907,60.325 189.25,60.325 ; R12.2@189.25,58.175 189.25,60.325 ; C23.2@189.295,61.875 189.25,60.325
  Bottom Layer w0.6: v1(118.897,139.623) 133.35,139.623 ; U3.17@143.52,142.65 143.52,141.469 141.674,139.623 133.35,139.623 ; v1(183.325,146.725) 159.923,146.725 158.875,147.773 135.987,147.773 132.08,143.866 132.08,140.893 133.35,139.623
NetC10_2: C10.2 D1.1 U4.6 | length 54
  Bottom Layer w0.6: C10.2@39.124,76.041 39.124,82.668 D1.1@39.378,82.922 39.378,90.254 40.563,91.439 40.563,91.596 41.54,92.573 44.186,92.573 44.303,92.456 46.694,92.456 51.189,87.961 51.189,87.463 50.838,87.112 50.624,87.112 49.833,86.321 49.833,78.985 50.894,77.924 56.381,77.924 58.696,80.239 58.696,82.257 57.905,83.048 57.847,83.048 57.717,83.048 56.977,83.788 U4.6@56.396,83.788
NetC12_2: C12.2 D4.1 U5.6 | length 38.9
  Top Layer w0.6: C12.2@93.445,75.941 94.175,76.671 D4.1@94.175,82.822
  Bottom Layer w0.6: D4.1@94.175,82.822 94.175,89.857 97.112,92.794 99.417,92.794 101.717,90.494 104.756,90.494 108.238,87.012 109.184,87.012 109.975,86.221 109.975,85.275 111.36,83.89 113.065,83.89 U5.6@113.267,83.688
NetC14_2: C14.2 D7.1 U6.6 | length 38.9
  Top Layer w0.6: C14.2@154.07,76.6 154.8,77.33 D7.1@154.8,83.647 156.45,81.997 156.45,79.621 157.421,78.65 157.921,78.65 159.696,76.875 171.465,76.875 175.375,80.785 175.375,80.855 175.484,80.964 175.484,82.982 174.693,83.773 174.505,83.773 173.765,84.513 U6.6@173.184,84.513
NetD2_2: D2.2 R1.1 U4.1 | length 10.6
  Top Layer w0.6: R1.1@52.133,96.869 52.133,93.945 52.403,93.675 D2.2@52.403,90.773
  Bottom Layer w0.6: R1.1@52.133,96.869 54.051,96.869 54.432,96.488 U4.1@56.396,96.488
NetD3_2: D3.2 R2.1 U4.7 | length 10.3
  Bottom Layer w0.6: R2.1@52.133,85.312 52.133,82.665 52.403,82.395 D3.2@52.403,79.724 53.927,81.248 U4.7@56.396,81.248
NetD5_2: D5.2 R3.1 U5.1 | length 12
  Top Layer w0.6: R3.1@107.675,96.769 107.675,93.844 107.945,93.574 D5.2@107.945,90.673
  Bottom Layer w0.6: R3.1@107.675,96.769 110.261,96.769 110.642,96.388 U5.1@113.267,96.388
NetD6_2: D6.2 R4.1 U5.7 | length 11.7
  Top Layer w0.6: R4.1@107.675,85.212 107.675,82.541 107.945,82.271 D6.2@107.945,79.624
  Bottom Layer w0.6: D6.2@107.945,79.624 109.469,81.148 U5.7@113.267,81.148
NetD8_2: D8.2 R5.1 U6.1 | length 10.2
  Top Layer w0.6: R5.1@169.3,97.594 169.3,94.656 169.57,94.386 D8.2@169.57,91.498
  Bottom Layer w0.6: R5.1@169.3,97.594 171.044,97.594 171.425,97.213 U6.1@173.184,97.213
NetD9_2: D9.2 R6.1 U6.7 | length 23.2
  Top Layer w0.6: D9.2@158.93,80.45 159.436,80.45 159.436,80.467 160.012,80.467 160.03,80.449 165.081,85.5 ; R6.1@168.8,85.5 165.081,85.5 ; U6.7@173.184,81.973 171.348,81.973 169.3,84.021 169.3,86.037 165.618,86.037 165.081,85.5
NetF1_1: F1.1 J1.P | length 15.8
  Top Layer w10: J1.P@24.45,138.6 24.45,123.55 F1.1@25,123
NetR7_1: R7.1 U7.5 | length 12.6
  Bottom Layer w0.6: U7.5@57.255,53.486 63.764,53.486 R7.1@68.075,49.175
NetR9_1: R9.1 U9.5 | length 13.4
  Bottom Layer w0.6: U9.5@117.18,53.386 117.18,52.769 117.236,52.713 124.962,52.713 R9.1@128.5,49.175
NetR12_1: R12.1 U10.5 | length 14.2
  Bottom Layer w0.6: U10.5@177.105,53.386 177.105,52.773 177.115,52.763 185.662,52.763 R12.1@189.25,49.175
"OC Trip": R10.1 U3.24 U8.1 U8.2 U8.14 | length 57.4
  Top Layer w0.6: U8.2@123.068,127.48 U8.1@123.068,130.02 123.068,132.08 123.5,132.513 R10.1@123.5,134.575
  Bottom Layer w0.6: U8.14@115.127,130.02 U8.1@123.068,130.02 ; R10.1@123.5,134.575 155.057,134.575 161.3,140.818 U3.24@161.3,142.65
PGND: C1.2 C2.2 C3.2 C4.2 C5.2 C6.2 C7.1 C8.1 C9.1 J1.N R19.2 R20.2 R21.2 RJ1.1 U1.2 U1.3 U2.2 U2.3 U4.2 U5.2 U6.2 U7.1 U9.1 U10.1 | length 619.6
  Top Layer w0.6: v1(50.95,59.725) 52.55,59.725 52.638,59.813 52.638,61.113 53.412,61.113 53.5,61.2 53.5,63.425 ; C8.1@77.15,51.845 77.15,69.098 ; 77.155,70.685 78.737,70.685 78.74,70.688 ; v1@110.719,59.817 110.719,69.901 111.503,70.685 111.506,70.688 ; U5.2@113.267,93.848 115.599,93.848 115.95,93.496 115.95,92.128 115.951,92.127 115.951,87.727 118.105,85.572 118.105,77.287 111.506,70.688 ; R20.2@115.275,60.05 118.948,60.05 118.948,62.738 116.434,65.253 ; 136.797,70.688 111.506,70.688 ; 136.977,70.508 137.393,70.508 155.632,70.508 ; C9.1@137.325,52.201 137.393,52.269 155.632,70.508 ; v1@171.225,58.496 172.72,58.496 176.122,61.898 176.122,70.505 ; U6.2@173.184,94.673 173.691,94.166 174.559,94.166 176.684,92.041 176.684,80.397 176.122,79.836 176.122,70.505 ; 180.13,70.505 176.122,70.505 ; 155.632,70.508 165.875,70.508 165.879,70.505 176.122,70.505
  Top Layer w0.8: C8.1@77.155,51.845 77.155,69.103 77.155,70.685 ; C9.1@136.975,51.845 137.393,52.263 137.393,52.269 137.393,70.508
  Top Layer w5: v1(51.7,70.6) v1(55.7,70.6) v1(59.7,70.6) 77.07,70.6
  Bottom Layer w0.6: 40.64,60.96 40.64,55.372 49.936,46.076 ; U1.3@43.375,106.06 43.375,99.805 44.511,98.669 44.642,98.669 45.433,97.878 45.433,97.747 48.455,94.725 55.038,94.725 55.815,93.948 U4.2@56.396,93.948 ; v1(50.95,59.725) 51.599,59.725 52.076,59.248 53.434,59.248 53.445,59.237 U7.1@53.445,58.314 ; 104.078,65.849 103.369,65.849 101.375,63.854 101.375,57.35 114.25,44.475 130.736,44.475 133.251,46.99 133.251,48.926 136.17,51.845 C9.1@136.975,51.845 ; v1@110.719,59.817 112.319,58.217 ; v1(111.4,59.7) 111.914,59.7 112.466,59.148 113.359,59.148 113.37,59.137 U9.1@113.37,58.214 ; v1@170.764,58.496 v1@171.044,58.217 ; v1(171.225,59.4) 171.477,59.148 173.284,59.148 173.295,59.137 U10.1@173.295,58.214
  Bottom Layer w2.54: U1.2@43.375,146.7 U1.3@43.375,106.06 53.47,106.06 57.835,110.425 65.48,110.425 U2.3@69.845,106.06 U2.2@69.845,146.7
  Bottom Layer w5: J1.N@13.55,138.6 12.855,138.6 7.394,133.139 C1.2@7.394,127.524 C2.2@7.394,116.983 C3.2@7.394,106.442 C4.2@7.394,95.901 C5.2@7.394,85.233 C6.2@7.394,74.565 7.394,70.374 10.323,67.445 48.545,67.445 v1(51.7,70.6) v1(55.7,70.6) v1(59.7,70.6)
"Phase A": C10.1 pad.CA Q1.2 Q1.3 Q1.5 Q1.6 Q1.7 Q4.8 R13.2 U4.5 | length 94.6
  Top Layer w0.8: R13.2@33.9,58.175 33.9,58.35 33.9,73.357 C10.1@36.584,76.041 36.584,73.819 37.053,73.35 43.025,73.35 49.733,80.058 49.733,86.363 50.582,87.212 53.684,87.212 54.415,86.481 56.243,86.481 U4.5@56.396,86.328
  Top Layer w5: 25.825,46.4 25.825,54.75 29.425,58.35 33.9,58.35 38.25,58.35 46.1,50.5 46.1,40.3